# Altium PCB PCB.PcbDoc
Units mm, origin at the board's own origin, x right, y up, seen from the top; angles counter-clockwise.
Board outline 90 x 70 mm, 2 copper layers (Top Layer, Bottom Layer), stack 1.5 mm thick; 42 components, 32 nets, 176 pads, 135 vias.
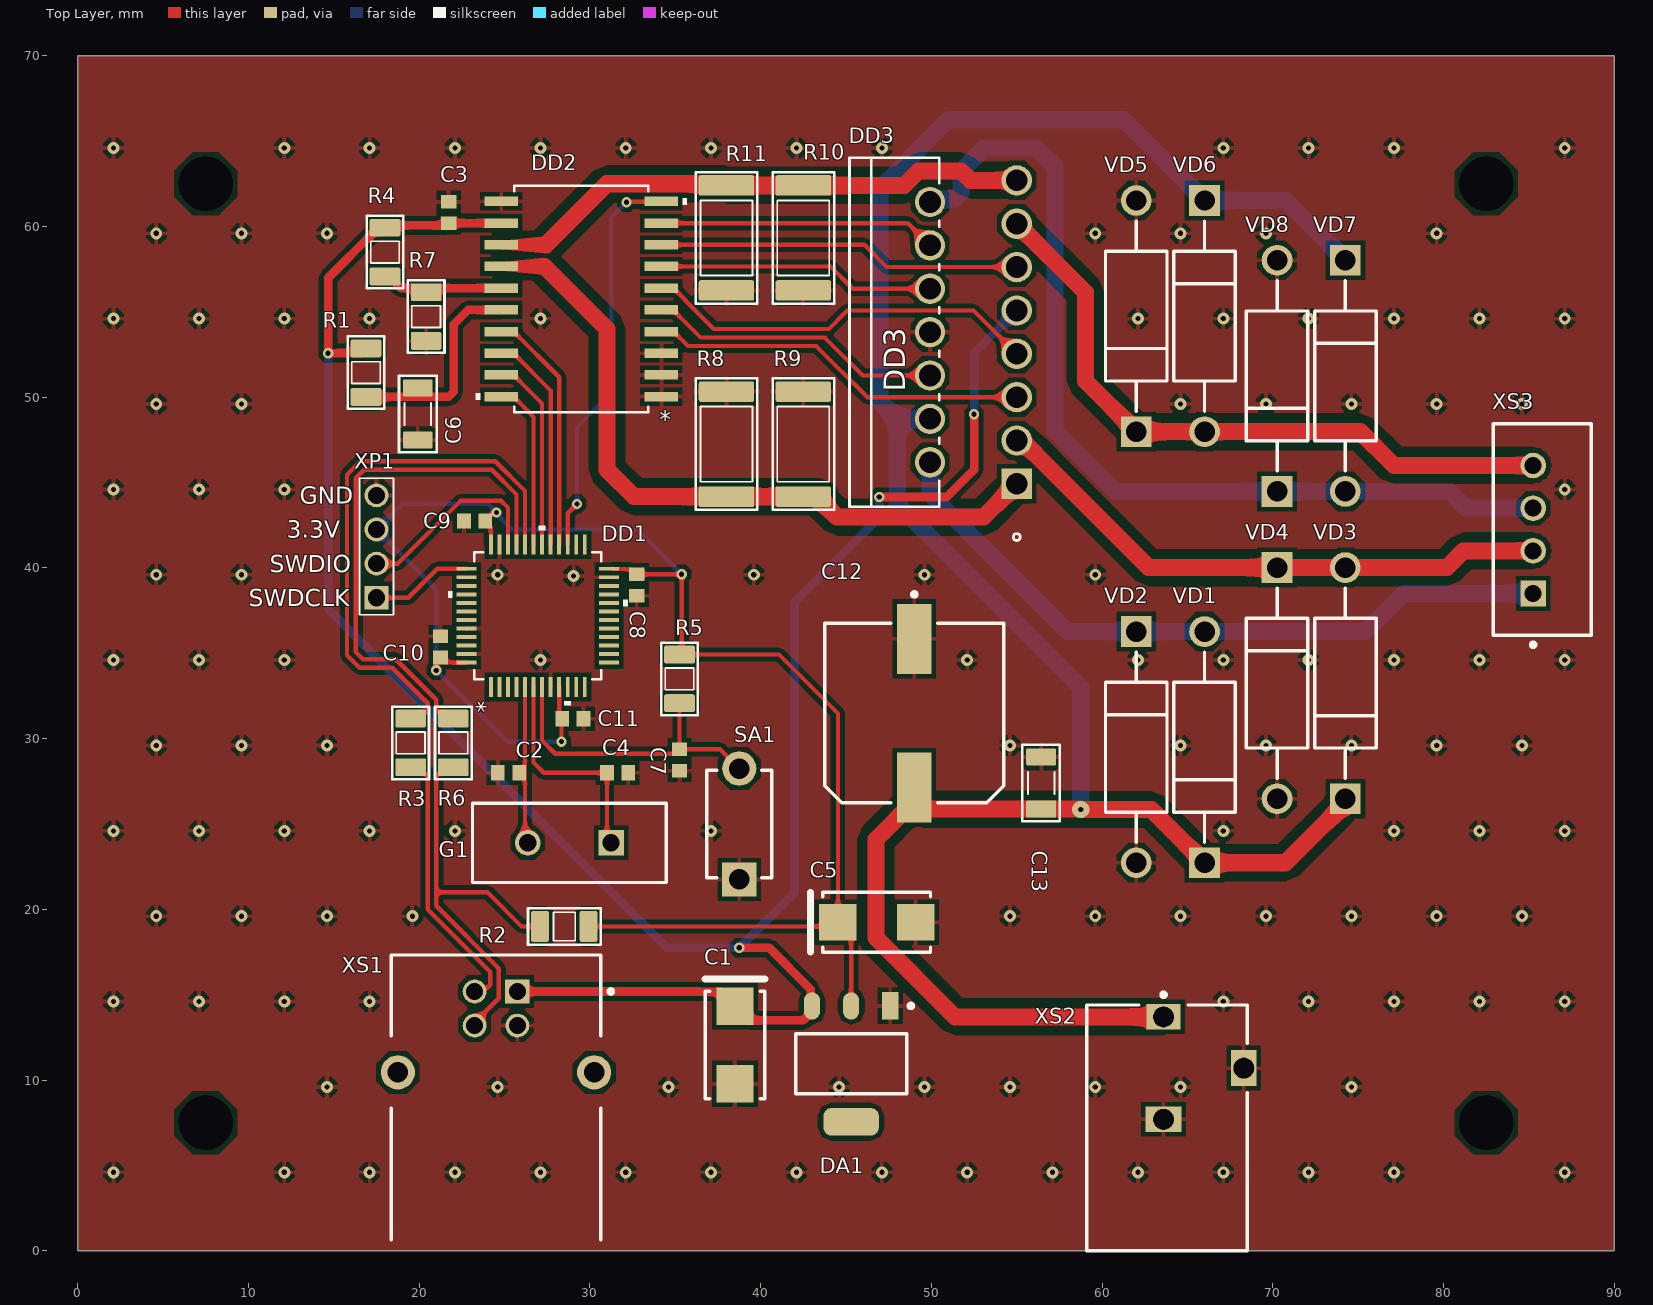
[diagram p0: Top Layer view]
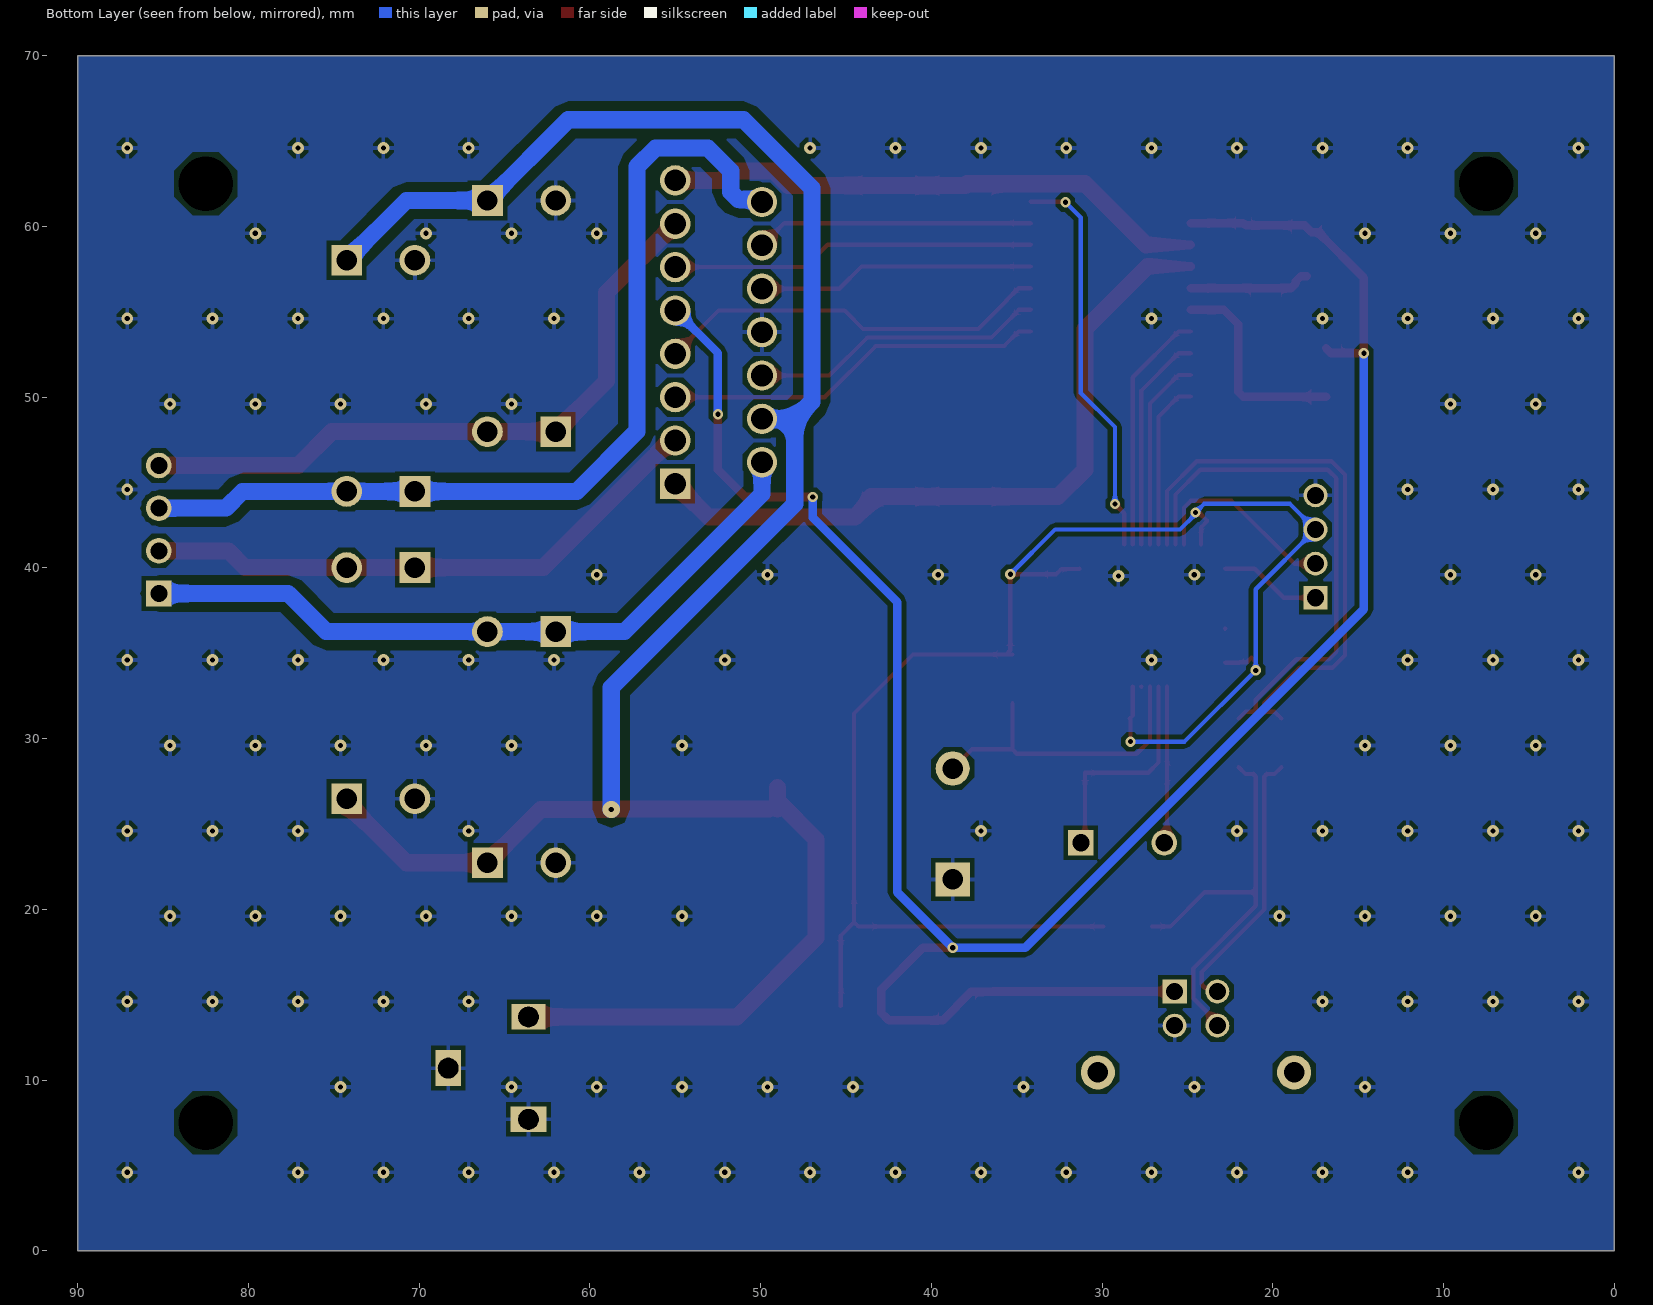
[diagram p1: Bottom Layer view, seen from below]
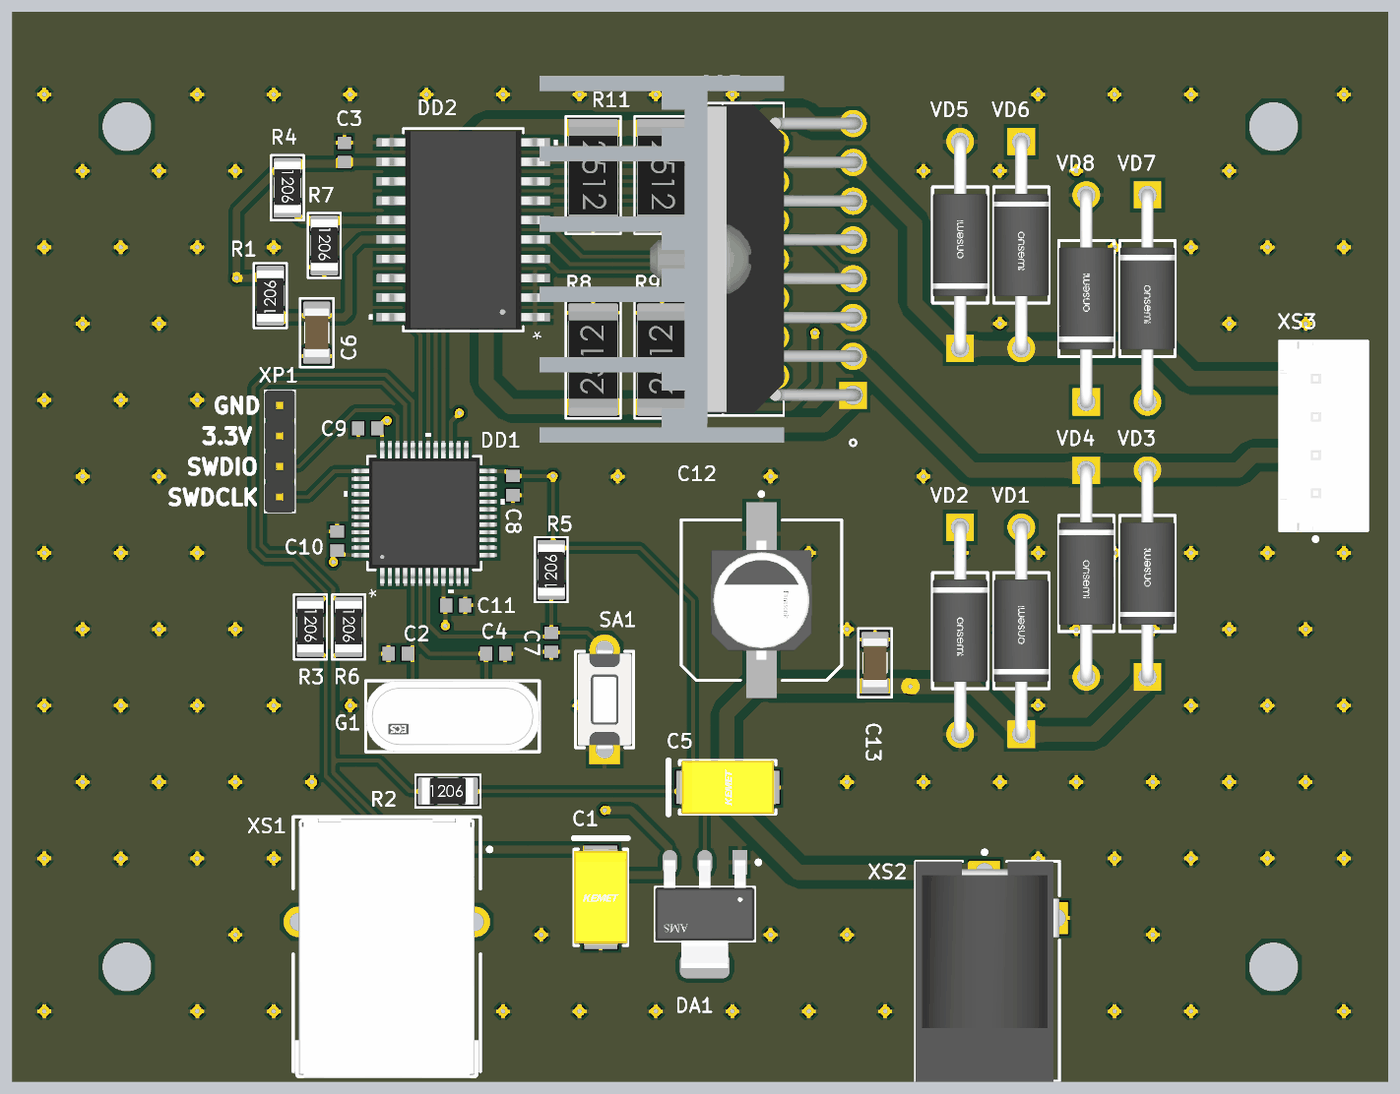
[diagram p2: 3D render of the assembled board from above, using the file's embedded part models]

## Layer stack, top to bottom
Top Solder: solder mask 0.001, Solder Resist, Dk 3.5
Top Layer: signal copper 0.035
Dielectric 1: dielectric 1.43, FR-4, Dk 4.8
Bottom Layer: signal copper 0.035
Bottom Solder: solder mask 0.001, Solder Resist, Dk 3.5

## Board outline
0,0 0,70 90,70 90,0

## Design rules (kind name [scope] priority, off if disabled: settings)
AcuteAngle [All] p1: minimum=6.00000000000000E+0001 checktracksonly=FALSE
Clearance Polygon_power [All vs InNetClass('PowerCircuits')] p1: gap=0.25 ignorepadtopadclearanceinfootprint=FALSE except(0.5: Track-Poly)
Clearance Third_Class [All] p2: gap=0.25 ignorepadtopadclearanceinfootprint=FALSE
DiffPairsRouting [All] p1: maxlimit=0.25 minlimit=0.25 mostfreqgap=0.25 toplayer_minwidth=0.25 toplayer_maxwidth=0.25 toplayer_prefwidth=0.25 bottomlayer_minwidth=0.25 bottomlayer_maxwidth=0.25 bottomlayer_prefwidth=0.25 maxuncoupledlength=12.7
HoleSize [All] p1: absolutevalues=TRUE maxlimit=6 minlimit=0.025 maxpercent=80.000 minpercent=20.000
MinimumSolderMaskSliver [All] p1: minsoldermaskwidth=0.2
PlaneClearance [InNetClass('PowerCircuits')] p1: clearance=0.5
PolygonConnect [All] p1: connectstyle=Relief reliefconductorwidth=0.25 reliefentries=4 polygonreliefangle="90 Angle" airgapwidth=0.25
RoutingTopology Power_12V [InNetClass('Power_Circuits')] p1: topology=Starburst
RoutingTopology [All] p2: topology=Shortest
RoutingVias Vias_12V [InNetClass('Power_Circuits')] p1 off: holewidth=0.4 width=1 viastyle="Through Hole" minholewidth=0.4 minwidth=1 maxholewidth=0.4 maxwidth=1
RoutingVias [All] p2: holewidth=0.3 width=0.6 viastyle="Through Hole" minholewidth=0.3 minwidth=0.6 maxholewidth=0.4 maxwidth=1
SilkToSilkClearance [All] p1: silktosilkclearance=0.15
SilkToSolderMaskClearance [IsPad] p1: minsilkscreentomaskgap=0.05 clearancetoexposedcopper=TRUE
SolderMaskExpansion [All] p1: expansion=0.102 istentingtop=FALSE
Width DiffPar [InNetClass('DiffPar')] p1: maxlimit=0.25 minlimit=0.25 preferedwidth=0.25
Width 5V_Nets [InNetClass('5V')] p2: maxlimit=1 minlimit=0.5 preferedwidth=0.5
Width Power_Circuits [InNetClass('PowerCircuits')] p3: maxlimit=1 minlimit=0.5 preferedwidth=1
Width Other_nets [All] p4: maxlimit=0.25 minlimit=0.25 preferedwidth=0.25
23 further rules are at their usual default settings.

## Classes and differential pairs
net class DiffPar: NetDD1_32 NetDD1_33 NetR2_1 NetR3_2
net class 5V: NetC1_1 NetC6_1 NetDD2_15
net class PowerCircuits: NetC12_2 NetDD2_13 NetDD2_14 NetDD3_2 NetDD3_3 NetDD3_13 NetDD3_14
component class E3: C1 C2 C3 C4 C5 C6 C7 C8 C9 C10 C11 C12 C13 DA1 DD1 DD2 DD3 G1 R1 R2 R3 R6 R10 R11 SA1 VD1 VD2 VD3 VD4 VD5 VD6 VD7 VD8 XP1 XS1 XS2 XS3
differential pair USBDIFFPAR: +NetDD1_33 -NetDD1_32
differential pair USB_DIFFPAR: +NetR2_1 -NetR3_2

## Components (designator, comment, footprint, x,y, rotation, side; value= is the part's Value field where it differs from the comment)
C1 "47uF" ECAPT_6032(C) 38.5,12.05 r270 top
C2 "CAP_SMD_1206" CAP_0603 25.237,28 r180 top
C3 "CAP_SMD_1206" CAP_0603 21.722,60.815 r270 top
C4 "CAP_SMD_1206" CAP_0603 31.625,28 r0 top
C5 "22uF" ECAPT_6032(C) 46.8,19.25 r0 top
C6 "CAP_SMD_1206" CAP_1206(SMD) 19.919,49.013 r270 top
C7 "CAP_SMD_1206" CAP_0603 35.25,28.75 r90 top
C8 "CAP_SMD_1206" CAP_0603 32.75,39 r270 top
C9 "CAP_SMD_1206" CAP_0603 23.25,42.75 r180 top
C10 "CAP_SMD_1206" CAP_0603 21.25,35.375 r90 top
C11 "CAP_SMD_1206" CAP_0603 29.003,31.167 r0 top
C12 "ECAP_10×10.2_SMD" ECAP_SMD_10x10.2 49,31.5 r270 top
C13 "CAP_SMD_1206" CAP_1206(SMD) 56.432,27.402 r90 top
DA1 "AMS1117-3.3V" SOT-223 45.3,10.95 r270 top
DD1 "STM32F103C8T6" LQFP48_STM-L 26.95,37.2 r90 top
DD2 "L297" SO-20_STM 29.5,55.75 r180 top
DD3 "L298N" Multiwatt15_V_STM_with_rad 55,44.92 r90 top
G1 "OSC8MHz" OSC8MHZ 28.8,23.9 r180 top
R1 "22k" RES_1206(SMD) 16.883,51.437 r90 top
R2 "1.5к" RES_1206(SMD) 28.5,19 r0 top
R3 "22 Omh" RES_1206(SMD) 19.5,29.75 r270 top
R4 "10k" RES_1206(SMD) 18,58.5 r270 top
R5 "10k" RES_1206(SMD) 35.25,33.5 r90 top
R6 "22 Omh" RES_1206(SMD) 22,29.75 r270 top
R7 "2.4k" RES_1206(SMD) 20.409,54.722 r270 top
R8 "1 Ом" RES_2512(SMD) 38,47.25 r90 top
R9 "1 Ом" RES_2512(SMD) 42.5,47.25 r90 top
R10 "1 Ом" RES_2512(SMD) 42.5,59.325 r270 top
R11 "1 Ом" RES_2512(SMD) 38,59.325 r270 top
SA1 "button" ? 38.75,25 r90 top
VD1 "FR207" THT_DIODE 66,29.5 r90 top
VD2 "FR207" THT_DIODE 62,29.5 r270 top
VD3 "FR207" THT_DIODE 74.25,33.25 r90 top
VD4 "FR207" THT_DIODE 70.25,33.25 r270 top
VD5 "FR207" THT_DIODE 62,54.75 r90 top
VD6 "FR207" THT_DIODE 66,54.75 r270 top
VD7 "FR207" THT_DIODE 74.25,51.25 r270 top
VD8 "FR207" THT_DIODE 70.25,51.25 r90 top
XP1 "PLS-4" PLS2-4 17.5,38.25 r90 top
XS1 "USB-B" USB_B_FEMALE 24.5,8.7 r0 top
XS2 "POWER" "2.5 X 6.5 MM32" 63.6,10.7 r270 top
XS3 "B4B-XH-A" B4B-XH-A 85.775,42.25 r270 top

## Footprints (in the part's own frame and the unit in brackets; to place one, negate y for a bottom-side part, rotate by r counter-clockwise, add the part's x,y. Pads: shape width x height; smd on the part's side, far side on the other; paste and mask are expansions set on the pad)
"2.5 X 6.5 MM32" [mm] "THD, 3-Leads, Body 14.4x9mm, Height 11mm"
  rect 1.5x2 hole 1.2: 1(-3,0)
  rect 1.5x2.1 hole 1.2: 2(3,0)
  rect 2.1x1.5 hole 1.2: 3(0,4.7)
  silkscreen extent -4.42,-4.5 10.7,4.9, body extent -3.7,-4.5 10.7,4.9, height 11
B4B-XH-A [mm]
  rect 1.5x1.5 hole 1 paste-2539.97 mask+0: 1(3.75,-0.525)
  round 1.5 hole 1 paste-2539.97 mask+0: 2(1.25,-0.525) 3(-1.25,-0.525) 4(-3.75,-0.525)
  silkscreen extent -6.2,-2.88 6.87,2.88, body extent -6.3,-2.98 6.3,2.98, height 0.25
CAP_0603 [mm] "Chip Capacitor, 2-Leads, Body 1.60x0.80mm, IPC High Density"
  rect 0.8x0.9 smd: 1(-0.625,0) 2(0.625,0)
  body extent -0.87,-0.48 0.87,0.48, height 0.87
CAP_1206(SMD) [mm] "Chip Capacitor, 2-Leads, Body 3,20x1,60mm, IPC Medium Density"
  rrect15% 1x1.75 smd: 1(-1.525,0) 2(1.525,0)
  silkscreen extent -2.25,-1.1 2.25,1.1, body extent -1.6,-0.8 1.6,0.8, height 1.6
ECAP_SMD_10x10.2 [mm]
  rect 4.1x2 smd paste+0 mask+0: 1(-4.35,0) 2(4.35,0)
  silkscreen extent -7.07,-5.25 5.25,5.25, body extent -6.65,-5.5 6.65,5.5, height 0.25
ECAPT_6032(C) [mm] "Molded Capacitor, 2-Leads, Body 6.30x3.50mm, IPC High Density"
  rect 2.2x2.15 smd: 1(-2.275,0) 2(2.275,0)
  silkscreen extent -3.87,-1.75 3.15,1.75, body extent -3.15,-1.75 3.15,1.75, height 2.79
LQFP48_STM-L [mil] "QFN, 48-Leads, Body 7.1x7.1mm, Pitch 0.5mm, Thermal Pad 5.6x5.6mm, IPC High Density"
  rect 46x9 smd paste+0 mask+0: 1(-164,108.27) 2(-164,88.58) 3(-164,68.9) 4(-164,49.21) 5(-164,29.53) 6(-164,9.84) 7(-164,-9.84) 8(-164,-29.53) 9(-164,-49.21) 10(-164,-68.9) 11(-164,-88.58) 12(-164,-108.27) 25(164,-108.27) 26(164,-88.58) 27(164,-68.9) 28(164,-49.21) 29(164,-29.53) 30(164,-9.84) 31(164,9.84) 32(164,29.53) 33(164,49.21) 34(164,68.9) 35(164,88.58) 36(164,108.27)
  rect 9x46 smd paste+0 mask+0: 13(-108.27,-164) 14(-88.58,-164) 15(-68.9,-164) 16(-49.21,-164) 17(-29.53,-164) 18(-9.84,-164) 19(9.84,-164) 20(29.53,-164) 21(49.21,-164) 22(68.9,-164) 23(88.58,-164) 24(108.27,-164) 37(108.27,164) 38(88.58,164) 39(68.9,164) 40(49.21,164) 41(29.53,164) 42(9.84,164) 43(-9.84,164) 44(-29.53,164) 45(-49.21,164) 46(-68.9,164) 47(-88.58,164) 48(-108.27,164)
  silkscreen extent -207,-207 207,207, body extent -181,-181 181,181, height 63
Multiwatt15_V_STM_with_rad [mil]
  rect 70x70 hole 50 paste-99999 mask+0: 1(0,0)
  round 70 hole 50 paste-99999 mask+0: 2(50,200) 3(100,0) 4(150,200) 5(200,0) 6(250,200) 7(300,0) 8(350,200) 9(400,0) 10(450,200) 11(500,0) 12(550,200) 13(600,0) 14(650,200) 15(700,0)
  silkscreen extent -130,-8 752,386, body extent -122,-21 823,808, height 982
OSC8MHZ [mm]
  rect 1.5x1.5 hole 1 paste-2539.97 mask+0: 1(-2.44,0)
  round 1.5 hole 1 paste-2539.97 mask+0: 2(2.44,0)
  silkscreen extent -5.68,-2.32 5.68,2.32, body extent -5.77,-2.42 5.77,2.42, height 0.25
PLS2-4 [mm]
  rect 1.4x1.4 hole 1: 1(0,0)
  round 1.4 hole 1: 2(2,0) 3(4,0) 4(6,0)
  silkscreen extent -1,-1 7,1, body extent -1,-1 7,1, height 6.01
RES_1206(SMD) [mm] "Chip Resistor, 2-Leads, Body 3,10x1,60mm, IPC Medium Density"
  rrect20% 1.05x1.8 smd: 1(-1.425,0) 2(1.425,0)
  silkscreen extent -2.12,-1.07 2.12,1.07, body extent -1.7,-0.86 1.65,0.86, height 0.85
RES_2512(SMD) [mm] "Chip Resistor, 2-Leads, Body 6,35x3,20mm, IPC Medium Density"
  rrect20% 1.2x3.25 smd: 1(-3.075,0) 2(3.075,0)
  silkscreen extent -3.85,-1.8 3.85,1.8, body extent -3.16,-1.6 3.16,1.6, height 0.62
SO-20_STM [mm]
  rect 1.97x0.558 smd paste+0 mask+0: 1(-4.686,5.715) 2(-4.686,4.445) 3(-4.686,3.175) 4(-4.686,1.905) 5(-4.686,0.635) 6(-4.686,-0.635) 7(-4.686,-1.905) 8(-4.686,-3.175) 9(-4.686,-4.445) 10(-4.686,-5.715) 11(4.686,-5.715) 12(4.686,-4.445) 13(4.686,-3.175) 14(4.686,-1.905) 15(4.686,-0.635) 16(4.686,0.635) 17(4.686,1.905) 18(4.686,3.175) 19(4.686,4.445) 20(4.686,5.715)
  silkscreen extent -6.18,-6.63 6.18,6.63, body extent -5.32,-6.5 5.32,6.5, height 2.64
SOT-223 [mm]
  rect 1.604x0.952 smd paste+0 mask+0: 1(-3.395,2.29)
  rrect100% 1.604x0.952 smd paste+0 mask+0: 2(-3.395,0) 3(-3.395,-2.29)
  rrect59% 1.604x3.262 smd paste+0 mask+0: 4(3.395,0)
  silkscreen extent -3.52,-3.25 1.75,3.63, body extent -4.7,-3.75 4.7,3.75, height 0.25
THT_DIODE [mm]
  round 1.8 hole 1.2 paste-2539.97 mask+0: 1(6.77,0)
  rect 1.8x1.8 hole 1.2 paste-2539.97 mask+0: 2(-6.77,0)
  silkscreen extent -5.57,-1.8 5.57,1.8, body extent -7.67,-1.9 7.67,1.9, height 0.25
USB_B_FEMALE [mm]
  rect 1.42x1.42 hole 1 paste-2539.97 mask+0: 1(1.25,6.49)
  round 1.4 hole 1 paste-2539.97 mask+0: 2(-1.25,6.49) 3(-1.25,4.49) 4(1.25,4.49)
  round 2 hole 1.2 paste-2539.97 mask+0: 5(-5.75,1.75) 6(5.75,1.75)
  silkscreen extent -6.12,-8.05 6.85,8.62, body extent -7.87,-8.72 7.87,8.72, height 0.25
? [mm]
  rect 2x2 hole 1.2 paste-2539.97 mask+0: 1(-3.25,0)
  round 2 hole 1.2 paste-2539.97 mask+0: 2(3.25,0)
  silkscreen extent -3.15,-1.9 3.15,1.9, body extent -4.3,-2 4.3,2, height 0.25

## Part data
C1 C5: library part ECAPT_6032, "Tantalum_SMD", ComponentLink1Description=ChipDip
  C1: ComponentLink1URL=https://www.chipdip.ru/product/293d476x0016c2te3-chip-tant-16v-47mkf-20-c-vishay-8002699624
  C5: ComponentLink1URL=https://www.chipdip.ru/product/293d226x9010c2te3-chip-tant-10v-22mkf-10-c-vishay-8389874982
DA1: "800mA LOW DROPOUT VOLTAGE REGULATOR SOT-223 PACKAGE"
DD1: library part STM32F103C8T6_Stepper, "ARM microcontroller; Flash: 64kB; 72MHz; SRAM: 20kB; LQFP48"
DD2: library part L297_SO20
DD3: "DUAL FULL-BRIDGE DRIVER"
R1 R2 R4 R5 R7: library part RES_SMD_1206, ComponentLink1Description="Chip Dip"
  R1 R5: ComponentLink1URL=https://www.chipdip.ru/product/0.25vt-1206-10-kom-1-chip-rezistor-smd-9000079659
  R2: ComponentLink1URL=https://www.chipdip.ru/product/0.25vt-1206-22-om-1-chip-rezistor-smd-9000079875
  R4 R7: ComponentLink1URL=https://www.chipdip.ru/product/0.25vt-1206-430-om-1-chip-rezistor-smd-9000079906
R3 R6: library part RES_SMD_1206, "20 Omh", ComponentLink1Description="Chip Dip", ComponentLink1URL=https://www.chipdip.ru/product/0.25vt-1206-22-om-1-chip-rezistor-smd-9000079875
R8 R9 R10 R11: library part RES_2512, ComponentLink1Description="Chip Dip"
  R8 R10 R11: ComponentLink1URL=https://www.chipdip.ru/product/1vt-2512-1-om-chip-rezistor-smd-9000190001
  R9: ComponentLink1URL=*https://www.chipdip.ru/product/1vt-2512-1-om-chip-rezistor-smd-9000190001
XP1: library part SWD
XS1: library part USB_B, "SOCKET 4PIN USB B 2.0"
XS3: "SOCKET 4PIN, вилка прямая на плату"
C12: ComponentLink1Description=Shop, ComponentLink1URL=https://www.chipdip.ru/product/ecap-smd-470mkf-25v-105-s-10-10.2mm-eeefk1e471p-panasonic-9000100744, ComponentLink2Description=Alternate, ComponentLink2URL=https://www.chipdip.ru/product/ecap-smd-470mkf-25v-105-c-20-10x10.5mm-jb-capacitors-9000565751

## Free pads (board coordinates)
  round 0 hole 3.2 unplated: 3(7.5,7.5) 3(7.5,62.5) 3(82.5,7.5) 3(82.5,62.5)

## Via types
v1: diameter 0.7, hole 0.3, Top Layer to Bottom Layer, 124 vias
v2: diameter 0.6, hole 0.3, Top Layer to Bottom Layer, 10 vias
v3: diameter 1, hole 0.3, Top Layer to Bottom Layer, 1 vias

## Nets (pads, with @x,y where several pads share a name; then routed paths per layer and width w, separated by ;. In a path a pad name is that pad's centre, name@x,y a point inside that pad or via, vN(x,y) a via of type N, cw(c..) or ccw(c..) an arc to the next point about the centre after c; other vN are vias at no path point)
GND: C1.2 C2.2 C3.1 C4.2 C5.2 C6.2 C7.1 C8.2 C9.2 C10.2 C11.2 C12.1 C13.2 DA1.1 DD1.8 DD1.23 DD1.35 DD1.44 DD1.47 DD2.1 DD2.2 DD2.3 DD2.11 DD3.8 R7.2 R8.2 R9.2 R10.2 R11.2 SA1.1 VD2.1 VD4.1 VD5.1 VD8.1 XP1.4 XS1.4 XS2.2 XS2.3 | length 0.1
  Top Layer w0.25: DD1.44 DD1.44@22.795,36.439 ; DD1.8 DD1.8@27.704,33.038 ; DD3.8@49.89,53.78 DD3.8
  other v1: 2.1,4.6 12.1,4.6 17.1,4.6 22.1,4.6 27.1,4.6 32.1,4.6 37.1,4.6 42.1,4.6 47.1,4.6 52.1,4.6 57.1,4.6 62.1,4.6 67.1,4.6 72.1,4.6 77.1,4.6 87.1,4.6 14.6,9.6 24.6,9.6 34.6,9.6 44.6,9.6 49.6,9.6 54.6,9.6 59.6,9.6 64.6,9.6 74.6,9.6 2.1,14.6 7.1,14.6 12.1,14.6 17.1,14.6 67.1,14.6 72.1,14.6 77.1,14.6 82.1,14.6 87.1,14.6 4.6,19.6 9.6,19.6 14.6,19.6 19.6,19.6 54.6,19.6 59.6,19.6 64.6,19.6 69.6,19.6 74.6,19.6 79.6,19.6 84.6,19.6 2.1,24.6 7.1,24.6 12.1,24.6 17.1,24.6 22.1,24.6 37.1,24.6 67.1,24.6 77.1,24.6 82.1,24.6 87.1,24.6 4.6,29.6 9.6,29.6 14.6,29.6 54.6,29.6 64.6,29.6 69.6,29.6 74.6,29.6 79.6,29.6 84.6,29.6 2.1,34.6 7.1,34.6 12.1,34.6 27.1,34.6 52.1,34.6 62.1,34.6 67.1,34.6 72.1,34.6 77.1,34.6 82.1,34.6 87.1,34.6 29.05,39.525 4.6,39.6 9.6,39.6 24.6,39.6 39.6,39.6 49.6,39.6 59.6,39.6 2.1,44.6 7.1,44.6 12.1,44.6 87.1,44.6 4.6,49.6 9.6,49.6 64.6,49.6 69.6,49.6 74.6,49.6 79.6,49.6 84.6,49.6 2.1,54.6 7.1,54.6 12.1,54.6 17.1,54.6 27.1,54.6 62.1,54.6 67.1,54.6 72.1,54.6 77.1,54.6 82.1,54.6 87.1,54.6 4.6,59.6 9.6,59.6 14.6,59.6 59.6,59.6 64.6,59.6 69.6,59.6 79.6,59.6 2.1,64.6 12.1,64.6 17.1,64.6 22.1,64.6 27.1,64.6 32.1,64.6 37.1,64.6 42.1,64.6 47.1,64.6 67.1,64.6 72.1,64.6 77.1,64.6 87.1,64.6
NetC1_1: C1.1 C3.2 DA1.3 DD2.12 DD3.9 R1.2 R4.1 XS1.1 | length 136.5
  Top Layer w0.5: R1.2 16.608,52.587 15.233,52.587 15.221,52.576 v2(14.67,52.576) 14.67,56.995 17.325,59.65 17.725,59.65 18.132,60.057 21.59,60.057 21.725,60.192 24.811,60.192 DD2.12 ; XS1.1 36.41,15.19 36.425,15.175 37.675,15.175 38.5,14.35 C1.1 39.325,13.5 42.491,13.5 42.928,13.936 42.928,15.322 40.5,17.75 v2(38.75,17.75) ; v2(46.95,44.154) 50.904,44.154 52.5,45.75 v2(52.5,49)
  Bottom Layer w0.5: v2(14.67,52.576) 14.67,37.58 34.5,17.75 v2(38.75,17.75) 42,21 42,38 46.95,42.95 v2(46.95,44.154) ; v2(52.5,49) 52.5,52.58 DD3.9
NetC2_1: C2.1 DD1.5 G1.2 | length 9.2
  Top Layer w0.25: DD1.5 26.2,24.06 G1.2
NetC4_1: C4.1 DD1.6 G1.1 | length 13.2
  Top Layer w0.25: DD1.6 26.7,28.601 27.301,28 C4.1 31,24.14 G1.1
NetC5_1: C5.1 C8.1 C9.1 C10.1 C11.1 DA1.2 DD1.9 DD1.24 DD1.36 DD1.48 R2.2 R5.2 XP1.3 | length 98.9
  Top Layer w0.25: v2(21,34) 21,34.5 C10.1 21.525,34.475 21.939,34.475 21.964,34.45 DD1.48 ; DD1.36 24.2,42.375 23.875,42.7 C9.1 23.875,42.8 24.259,43.184 24.458,43.184 v2(24.525,43.251) ; DD1.9@28.211,33.034 28.211,31.334 C11.1 28.331,31.12 v2(28.331,29.823) ; R2.2 44.275,19 C5.1 ; DD1.24@31.323,39.95 31.333,39.939 32.386,39.939 32.7,39.625 C8.1 v2(35.375,39.625) 35.375,35.175 R5.2@35.625,34.925 ; R5.2 R5.2@35.625,34.925 ; DA1.2 45.3,18.475 C5.1 ; R5.2@35.625,34.925 41.075,34.925 44.525,31.475 C5.1
  Bottom Layer w0.25: v2(24.525,43.251) 24.026,43.75 19,43.75 XP1.3 21,38.75 v2(21,34) 25.177,29.823 v2(28.331,29.823) ; v2@24.575,43.106 25.431,42.25 32.75,42.25 v2(35.375,39.625)
NetC6_1: C6.1 DD2.16 R1.1 | length 12.4
  Top Layer w0.5: R1.1 21.721,50.012 22.014,50.305 22.014,54.264 22.865,55.115 DD2.16
NetC7_2: C7.2 DD1.7 R5.1 SA1.2 | length 18.3
  Top Layer w0.25: DD1.7 27.2,29.894 27.975,29.119 34.994,29.119 C7.2 ; R5.1 C7.2 ; SA1.2 37.625,29.375 C7.2
NetC12_2: C12.2 C13.1 DD3.4 VD1.2 VD3.2 VD6.2 VD7.2 XS2.1 | length 133.5
  Top Layer w1: C12.2@49,25.875 C12.2 ; C12.2@49,26.35 46.75,24.1 46.75,18.339 51.389,13.7 XS2.1 ; C12.2@49.5,25.875 55.807,25.875 C13.1@55.808,25.877 ; C13.1 C13.1@55.808,25.877 ; VD3.2 73.95,26.18 73.95,25.93 70.75,22.73 VD1.2 62.88,25.85 v3(58.75,25.85) 58.723,25.877 C13.1 ; C13.1@55.808,25.877 C13.1 ; C13.1@55.808,25.877 C13.1
  Bottom Layer w1: DD3.4 48,48.73 ; v3(58.75,25.85) 58.75,33 48,43.75 48,48.73 ; VD7.2 70.75,61.52 VD6.2 61.27,66.25 51,66.25 47,62.25 47,49.73 48,48.73
NetDD1_27: DD1.27 DD2.10 | length 23.5
  Top Layer w0.25: DD1.27 28.7,43.2 v2(29.25,43.75) ; v2(32.15,61.418) 32.174,61.441 34.163,61.441 DD2.10
  Bottom Layer w0.25: v2(29.25,43.75) 29.25,48.25 31.25,50.25 31.25,60.518 v2(32.15,61.418)
NetDD1_28: DD1.28 DD2.17 | length 14.3
  Top Layer w0.25: DD2.17 25.52,53.845 28.2,51.165 DD1.28
NetDD1_29: DD1.29 DD2.18 | length 12.8
  Top Layer w0.25: DD2.18 25.52,52.575 27.7,50.395 DD1.29
NetDD1_30: DD1.30 DD2.19 | length 11.3
  Top Layer w0.25: DD2.19 25.52,51.305 27.2,49.625 DD1.30
NetDD1_31: DD1.31 DD2.20 | length 9.9
  Top Layer w0.25: DD2.20 25.52,50.035 26.7,48.855 26.7,42.387 DD1.31
NetDD1_32: DD1.32 R3.1 | length 32.6
  Top Layer w0.25: R3.1 19.9,31.575 20.354,31.575 20.5,31.721 20.5,32.069 18.421,34.148 16.511,34.148 15.779,34.88 15.779,45.457 16.571,46.25 24.457,46.25 26.2,44.507 26.2,42.594 DD1.32
NetDD1_33: DD1.33 R6.1 | length 31
  Top Layer w0.25: R6.1 21.6,31.575 21.146,31.575 21,31.721 21,32.276 18.628,34.648 16.718,34.648 16.279,35.087 16.279,45.25 16.779,45.75 24.25,45.75 25.7,44.3 25.7,42.802 DD1.33
NetDD1_34: DD1.34 XP1.2 | length 11.6
  Top Layer w0.25: XP1.2 18.745,40.25 22.421,43.926 24.805,43.926 25.2,43.531 25.2,42.971 DD1.34
NetDD1_37: DD1.37 XP1.1 | length 6
  Top Layer w0.25: XP1.1 19.355,38.25 21.055,39.95 DD1.37
NetDD2_4: DD2.4 DD3.5 | length 22.4
  Top Layer w0.25: DD2.4 34.892,53.845 35.737,53 43.25,53 46.25,50 DD3.5
NetDD2_5: DD2.5 DD3.6 | length 17.3
  Top Layer w0.25: DD2.5 34.892,55.115 35.046,54.961 35.046,54.926 36.472,53.5 43.75,53.5 45.98,51.27 DD3.6
NetDD2_6: DD2.6 DD3.7 | length 23.3
  Top Layer w0.25: DD2.6 34.892,56.385 35.611,55.666 35.611,55.639 37.25,54 44,54 45.074,55.074 52.466,55.074 DD3.7
NetDD2_7: DD2.7 DD3.10 | length 16.3
  Top Layer w0.25: DD2.7 44.095,57.655 45.4,56.35 DD3.10
NetDD2_8: DD2.8 DD3.11 | length 21.4
  Top Layer w0.25: DD2.8 46.075,58.925 47.38,57.62 DD3.11
NetDD2_9: DD2.9 DD3.12 | length 16.3
  Top Layer w0.25: DD2.9 48.615,60.195 DD3.12
NetDD2_13: DD2.13 DD3.15 R10.1 R11.1 | length 32.3
  Top Layer w0.5: DD2.13 27.425,58.925
  Top Layer w1: 27.425,58.925 31,62.5 37.9,62.5 R11.1 R10.1 48.4,62.4 49.25,63.25 51.745,63.25 52.295,62.7 DD3.15
NetDD2_14: DD2.14 DD3.1 R8.1 R9.1 | length 42
  Top Layer w0.5: DD2.14 27.345,57.655
  Top Layer w1: 27.345,57.655 31,54 31,45.75 32.575,44.175 36.975,44.175 R8.1 43.525,44.175 43.625,44.075 43.625,43.836 44.482,42.979 53.059,42.979 DD3.1
NetDD2_15: DD2.15 R4.2 R7.1 | length 7.2
  Top Layer w0.5: R4.2 18.375,57.075 18.65,56.8 18.65,56.678 18.943,56.385 DD2.15
NetDD3_2: DD3.2 VD1.1 VD2.2 XS3.1 | length 41.5
  Bottom Layer w1: DD3.2 49.92,44.33 57.98,36.27 VD2.2 VD1.1 75.445,36.27 77.675,38.5 XS3.1
NetDD3_3: DD3.3 VD3.1 VD4.2 XS3.2 | length 33.7
  Top Layer w1: DD3.3 55.211,47.46 55.6,47.071 55.679,47.071 56.191,46.559 56.2,46.559 56.639,46.12 56.639,46.111 62.73,40.02 VD4.2 VD3.1 80.195,40.02 81.175,41 XS3.2
NetDD3_13: DD3.13 VD5.2 VD6.1 XS3.4 | length 39.1
  Top Layer w1: DD3.13 59.025,56.135 59.025,50.955 VD5.2 VD6.1 75.12,47.98 77.1,46 XS3.4
NetDD3_14: DD3.14 VD7.1 VD8.2 XS3.3 | length 55.2
  Bottom Layer w1: DD3.14 50.069,61.579 51.313,61.579 51.75,62.016 51.75,63.25 53.086,64.586 56.164,64.586 57.25,63.5 57.25,48 60.77,44.48 VD8.2 80.345,44.48 81.325,43.5 XS3.3
NetR2_1: R2.1 R6.2 XS1.3 | length 24.8
  Top Layer w0.25: R6.2 21.6,27.925 21.146,27.925 21,27.779 21,21 ; XS1.3 23.25,13.377 24.665,14.792 24.665,16.542 21,20.207 21,21 ; R2.1 26,19 24,21 21,21
NetR3_2: R3.2 XS1.2 | length 16
  Top Layer w0.25: R3.2 19.9,27.925 20.354,27.925 20.5,27.779 20.5,20 24.165,16.335 24.165,15.588 23.987,15.41 23.47,15.41 XS1.2
pads on no net: DA1.4 DD1.1 DD1.2 DD1.3 DD1.4 DD1.10 DD1.11 DD1.12 DD1.13 DD1.14 DD1.15 DD1.16 DD1.17 DD1.18 DD1.19 DD1.20 DD1.21 DD1.22 DD1.25 DD1.26 DD1.38 DD1.39 DD1.40 DD1.41 DD1.42 DD1.43 DD1.45 DD1.46 XS1.5 XS1.6

## Polygon pours and split planes (outlines as drawn)
GND on Top Layer "`" (solid, pour order 2): 0,70 90,70 90,0 0,0
GND on Bottom Layer "GND_L02_P000" (solid, pour order 0): 90,0 0,0 0,70 90,70

## Silkscreen, mask and mechanical layers (free items; w line width, h text height)
Mechanical 1:
  the board outline again, w0.254
Top Courtyard:
  circle w0.254: c82.5,7.5 r3
  circle w0.254: c82.5,62.5 r3
  circle w0.254: c7.5,62.5 r3
  circle w0.254: c7.5,7.5 r3

## Text inside footprints (layer, text, board x,y; h text height)
DD1: Top Overlay "*" at 24.35,31.525 h1 r90; Mechanical 13 "*" at 24.585,33.669 h1 r90
DD2: Top Overlay "*" at 34.758,49.604 h1 r180; Mechanical 13 "*" at 33.234,50.594 h1 r180
DD3: Mechanical 13 "TAB" at 46.282,53.334 h0.64 r90
XP1: Top Overlay "GND" at 13.004,43.754 h1; Top Overlay "3.3V" at 12.254,41.754 h1; Top Overlay "SWDIO" at 11.254,39.754 h1; Top Overlay "SWDCLK" at 10.004,37.754 h1